# EAGLE board ESCpower3 (EAGLE 5.11)
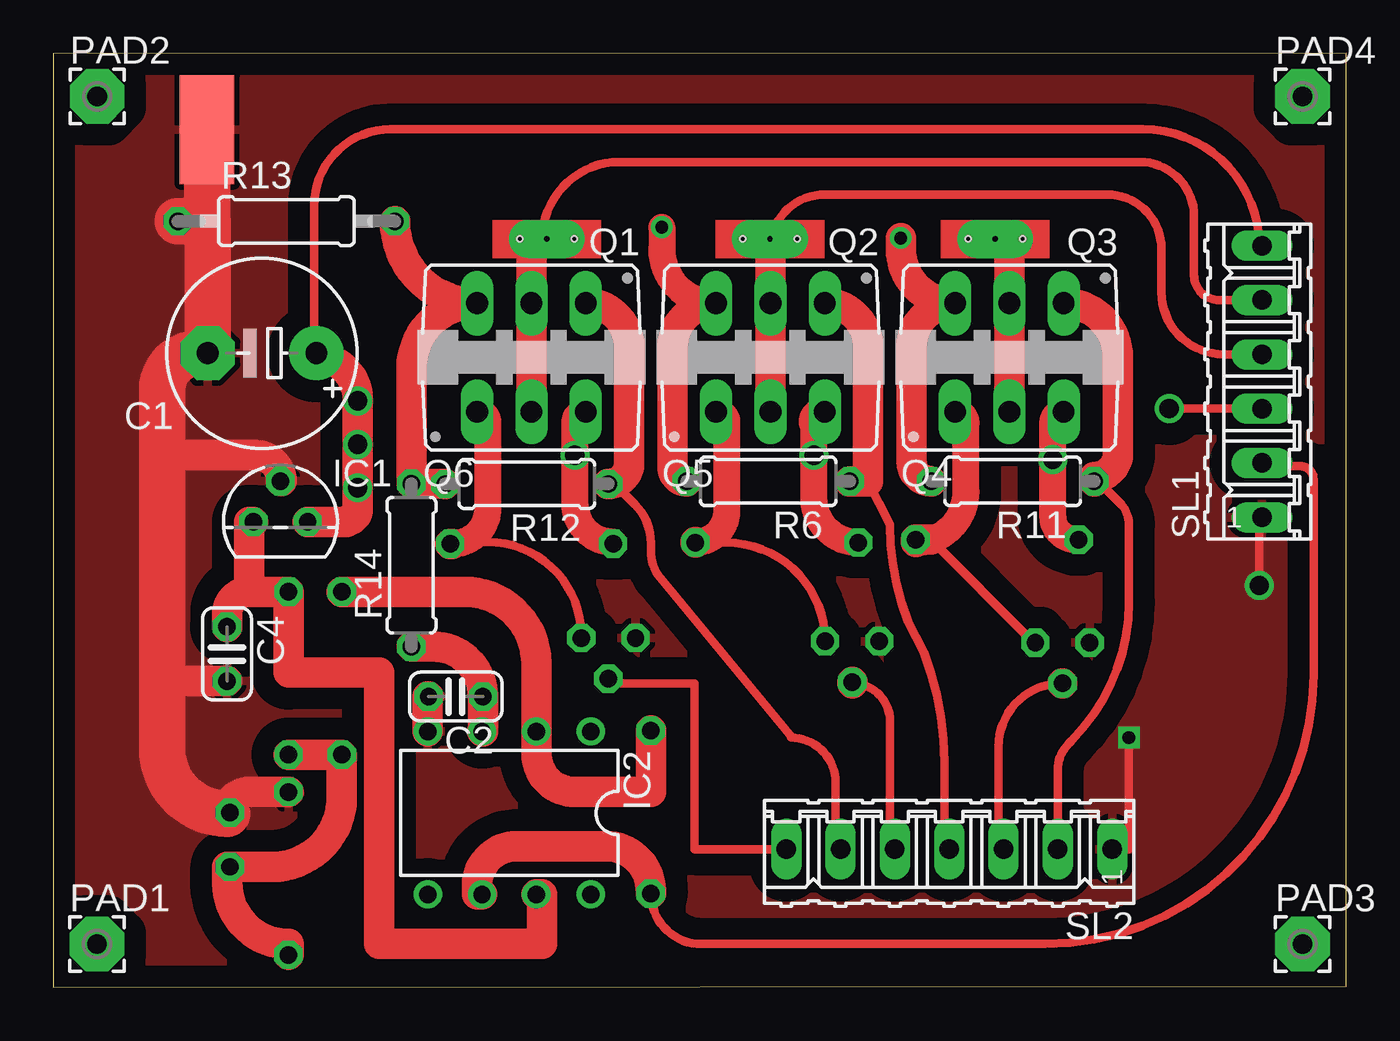
[diagram p0: board, top side]
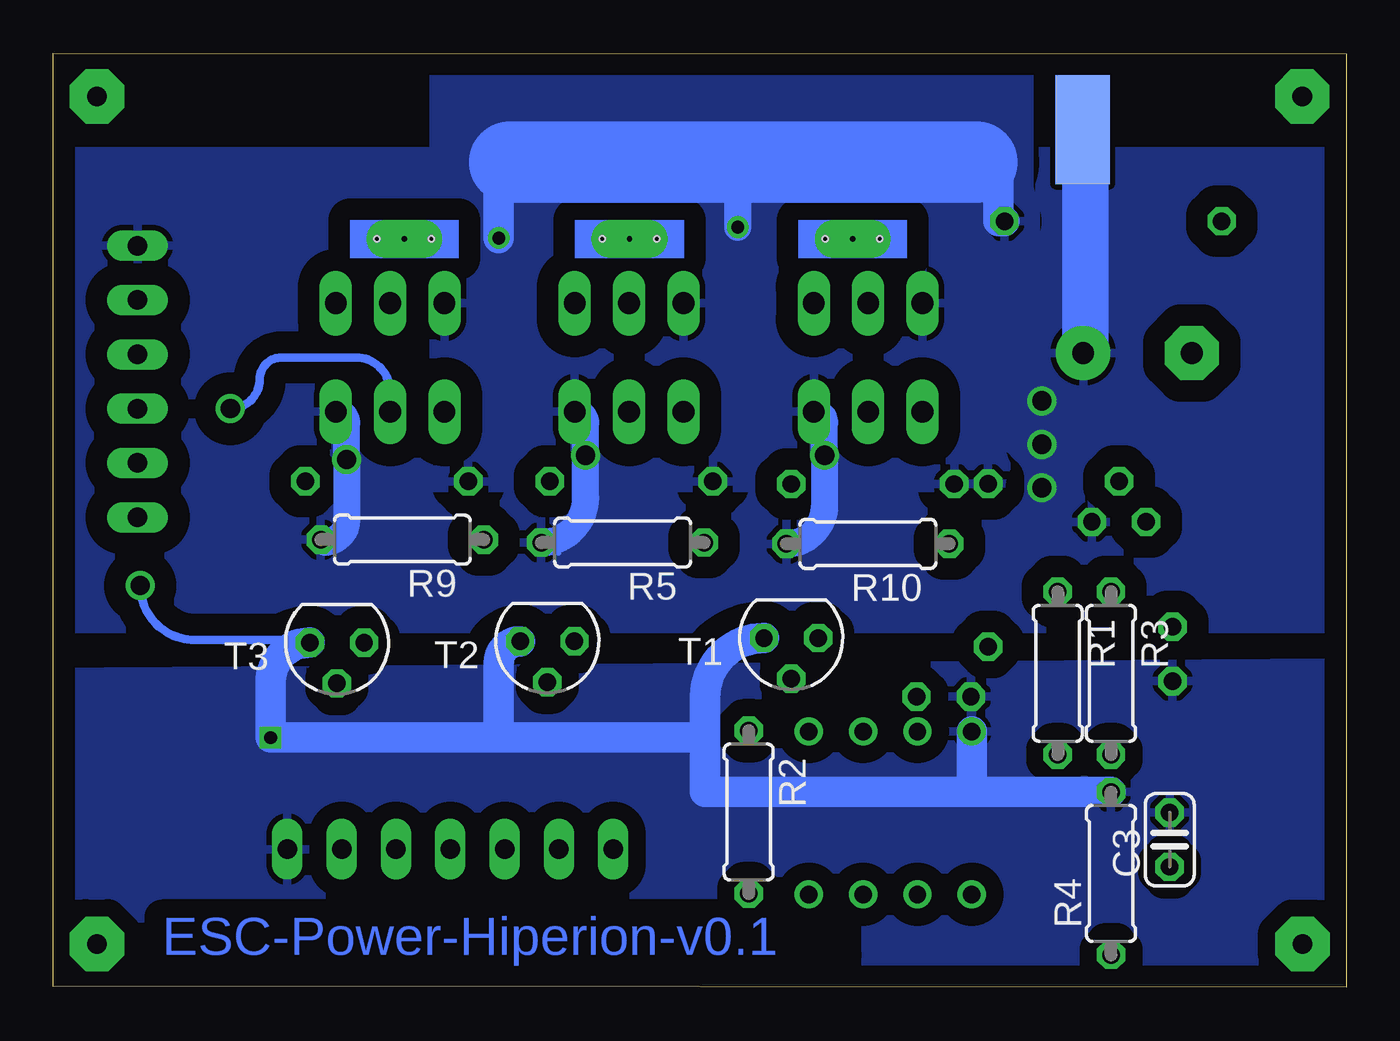
[diagram p1: board, bottom side, seen from below]

Size 60.45 x 43.68 mm. Coordinates in mm from the lower left corner, seen from the top.
Outline: 0,0 60.45,0.05 60.45,43.68 0,43.67 0,0
Copper layers (1*16): Top 0.035mm / dielectric 1.5mm / Bottom 0.035mm
Design rules "default": minimum track width 10mil, minimum drill 24mil, track to track 8mil, track to pad 8mil, pad to pad 8mil, via to via 8mil, smd to smd 8mil, copper to edge 40mil, drill to drill 8mil, minimum pad ring 10mil, minimum via ring 8mil, stop-mask expansion 4mil, vias tented up to drill 0mil, thermal gap 10mil

## Footprints (pad centres in the part's own frame; a part is rotated, then mirrored left to right if it is on the bottom)
BATTERY_CONNECTOR = smd 5.08 x 2.54: P$1 0,0
E5-8,5 = drill 1.016 pad 2.54 round: + -2.54,0 | drill 1.016 pad 2.54 octagon: - 2.54,0
C025-024X044 = drill 0.813 octagon: 1 -1.27,0; 2 1.27,0
TO92 = drill 0.813 octagon: 1 -1.27,0; 2 0,1.905; 3 1.27,0
DIL08 = drill 0.813 pad 1.27 round: 1 -3.81,-3.81; 2 -1.27,-3.81; 3 1.27,-3.81; 4 3.81,-3.81; 5 3.81,3.81; 6 1.27,3.81; 7 -1.27,3.81; 8 -3.81,3.81
2,54/0,9 = drill 0.914 pad 2.54 octagon: 1 0,0
TO220BV = drill 1.016 long: D 0,-2.54; G -2.54,-2.54; S 2.54,-2.54
0207/7 = drill 0.813 octagon: 1 -3.81,0; 2 3.81,0
0207/10 = drill 0.813 octagon: 1 -5.08,0; 2 5.08,0
06P = drill 0.914 long: 1 -6.35,0; 2 -3.81,0; 3 -1.27,0; 4 1.27,0; 5 3.81,0; 6 6.35,0
07P = drill 0.914 long: 1 -7.62,0; 2 -5.08,0; 3 -2.54,0; 4 0,0; 5 2.54,0; 6 5.08,0; 7 7.62,0
SOT54A = drill 0.813 octagon: B 0,1.905; C -1.27,0; E 1.27,0
MOTOR_CONNECTOR = drill 0.254 pad 1.778 long: PINO 0,0 | hole 0.254: -1.27,0; 1.27,0

## Placement (x,y rotation side)
BATTERY+  Battery+  [BATTERY_CONNECTOR]  12.32,40.11 270 bottom
C1  [E5-8,5]  9.75,29.67 180 top
C2  100n  [C025-024X044]  18.82,13.6 180 top
C3  [C025-024X044]  8.25,6.91 90 bottom
C4  100n  [C025-024X044]  8.11,15.6 270 top
IC1  7805L  [TO92]  10.62,21.77 0 top
IC2  TL071P  [DIL08]  21.31,8.16 180 top
PAD1  [2,54/0,9]  2.03,2.03 0 top
PAD2  [2,54/0,9]  2.05,41.68 0 top
PAD3  [2,54/0,9]  58.41,2.04 0 top
PAD4  [2,54/0,9]  58.41,41.67 0 top
Q1  IRF520  [TO220BV]  22.35,29.46 180 top
Q2  IRF520  [TO220BV]  33.53,29.46 180 top
Q3  IRF520  [TO220BV]  44.7,29.46 180 top
Q4  IRF9530  [TO220BV]  44.7,29.46 0 top
Q5  IRF9530  [TO220BV]  33.53,29.46 0 top
Q6  IRF9530  [TO220BV]  22.35,29.46 0 top
R1  4k7  [0207/7]  13.48,14.69 270 bottom
R2  18k  [0207/7]  27.94,8.21 270 bottom
R3  4k7  [0207/7]  10.99,14.69 270 bottom
R4  4k7  [0207/7]  10.99,5.33 90 bottom
R5  470  [0207/7]  33.83,20.81 180 bottom
R6  18k  [0207/7]  33.42,23.67 180 top
R9  470  [0207/7]  44.13,20.94 180 bottom
R10  470  [0207/7]  22.36,20.75 180 bottom
R11  18k  [0207/7]  44.86,23.67 180 top
R12  18k  [0207/7]  22.13,23.55 180 top
R13  SHUNT  [0207/10]  10.89,35.84 0 top
R14  4k7  [0207/7]  16.74,19.75 90 top
SL1  [06P]  56.51,28.34 90 top
SL2  [07P]  41.89,6.47 180 top
T1  BC547  [SOT54A]  25.95,16.34 180 bottom
T2  BC547  [SOT54A]  37.35,16.19 180 bottom
T3  BC547  [SOT54A]  47.19,16.13 180 bottom
U$3  MOTOR_CONNECTOR  [MOTOR_CONNECTOR]  23.08,35 0 top
U$6  MOTOR_CONNECTOR  [MOTOR_CONNECTOR]  33.51,35 0 top
U$9  MOTOR_CONNECTOR  [MOTOR_CONNECTOR]  44.04,35 0 top
U$11  BATTERY_CONNECTOR  [BATTERY_CONNECTOR]  7.18,40.11 270 top

## Library data of the parts
BATTERY+ U$3 U$6 U$9 U$11 = ESC
C1-C4 R1-R6 R9-R14 = rcl
IC1 IC2 = linear
PAD1-PAD4 = wirepad
Q1-Q6 = transistor-power
SL1 SL2 = con-amp-quick; OC_FARNELL: unknown; OC_NEWARK: unknown
T1-T3 = transistor-small-signal

## Nets
FASE_U: Q1.D Q6.D SL1.5 U$3.PINO
FASE_V: Q2.D Q5.D SL1.4 U$6.PINO
FASE_W: Q3.D Q4.D SL1.3 U$9.PINO
GND: C1.- C2.2 C3.2 C4.2 IC1.2 IC2.4 R4.2 R13.1 SL1.1 SL2.1 T1.E T2.E T3.E U$11.P$1
N$1: IC2.2 R1.1 R2.1
N$2: Q6.G R10.1 T1.C
N$5: Q5.G R5.1 T2.C
N$10: Q4.G R9.1 T3.C
N$13: C2.1 IC2.3 R14.1
PWR_MTR: IC2.6 R2.2 SL1.2
UH_PWM: SL2.7 T1.B
UL_PWM: Q1.G R12.1 SL2.6
VCC: C4.1 IC1.1 IC2.7 R3.1
VDD: BATTERY+.P$1 C1.+ IC1.3 Q4.S Q5.S Q6.S R5.2 R9.2 R10.2 SL1.6
VH_PWM: SL2.5 T2.B
VL_PWM: Q2.G R6.1 SL2.4
VREF: C3.1 R1.2 R3.2 R4.1
VSHUNT: Q1.S Q2.S Q3.S R6.2 R11.2 R12.2 R13.2 R14.2
WH_PWM: SL2.3 T3.B
WL_PWM: Q3.G R11.1 SL2.2

## Tracks (layer width: path | path; a pad name or v marks a point on that pad's centre or on a via)
FASE_U
  Top 0.406: 22.86,35 arc-90 26.47,38.61 50.8,38.61 arc-90 53.34,36.07 53.34,33.31 arc90 54.5,32.15 SL1.5
  Top 1.422: Q6.D Q1.D 22.35,35 22.86,35 U$3.PINO
FASE_V
  Top 0.406: 33.53,34.54 arc-90 36.07,37.08 49.28,37.08 arc-90 51.82,34.54 51.82,32.51 arc90 54.72,29.61 SL1.4
  Top 1.422: Q5.D Q2.D 33.53,34.54 33.53,35 U$6.PINO
FASE_W  (via drill 0.9)
  Top 0.406: v52.18,27.07 SL1.3
  Top 1.422: Q4.D Q3.D 44.7,35.05 44.04,35.05 U$9.PINO
  Bottom 0.406: v52.18,27.07 arc-90 50.8,28.45 arc90 49.78,29.46 46.31,29.46 arc90 44.7,27.86 Q4.D 44.7,26.42
GND  (via drill 0.6, 0.9)
  Top 0.406: SL2.1 50.29,6.47 v50.29,11.68 | v56.39,18.8 56.39,21.87 arc-90 SL1.1
  Top 1.422: C3.2 8.25,8.13 8.13,8.13 arc-90 9.14,9.14 R4.2 | 5.08,14.22 arc-90 5.19,14.33 C4.2 | IC1.2 10.67,23.68 arc90 9.46,24.89 5.08,24.89 | C2.2 17.5,13.6 IC2.4
  Top 2.184: 7.18,35.84 R13.1 | 8.13,8.13 arc-90 5.08,11.18 5.08,14.22 5.08,24.89 5.08,27.94 arc-90 6.81,29.67 C1.- 7.21,35.84 7.18,35.84 | 7.18,35.84 U$11.P$1
  Bottom 0.254: 50.16,14.98 49.78,15.24
  Bottom 0.406: v50.29,11.68 50.29,12.19 | 48.26,16.26 53.85,16.26 arc18 54.65,16.39 arc72 v56.39,18.8
  Bottom 1.422: R4.2 17.5,9.14 | 29.97,11.68 29.97,13.59 arc90 T1.E | 17.5,9.14 29.97,9.14 29.97,11.68 | 17.5,9.14 IC2.4 | 39.62,11.68 39.62,15.19 arc90 T2.E | 29.97,11.68 39.62,11.68 | T3.E arc-68 50.16,14.98 arc-22 50.29,14.29 v50.29,11.68 39.62,11.68
  pour Top (isolate 1.016): -1.02,46.74 61.98,46.74 61.98,-0.51 -1.02,-0.51
  pour Bottom (isolate 0.813): -6.1,15.24 64.52,14.73 64.52,-1.02 -6.1,-1.02
N$1
  Top 1.422: R1.1 19.23,18.5 arc-90 22.58,15.15 IC2.2 22.58,10.95 arc90 24.38,9.14 27.94,9.14 R2.1
N$2
  Top 0.406: T1.C 24.68,16.47 arc90 20.32,20.83 18.55,20.83 R10.1
  Top 1.27: 18.64,20.75 arc90 20.32,22.43 20.32,26.42 arc90 Q6.G
  Top 1.422: R10.1 18.64,20.75
N$5
  Top 0.406: T2.C arc90 31.46,20.81 R5.1
  Top 1.27: Q5.G arc-90 31.5,26.42 31.5,22.3 arc-90 30.02,20.83
  Top 1.422: R5.1 30.02,20.83
N$10
  Top 0.406: 41.03,20.95 45.72,16.26 45.79,15.75 T3.C
  Top 1.27: 40.32,20.83 arc90 42.67,23.18 42.67,26.42 arc90 Q4.G
  Top 1.422: 40.32,20.83 R9.1 41.03,20.95
N$13
  Top 1.422: IC2.3 20.09,11.97 C2.1 20.09,13.63 arc90 17.77,15.94 R14.1
PWR_MTR
  Top 0.406: R2.2 R2.2 arc90 30.3,2.03 46.38,2.03 arc90 58.93,14.59 58.93,23.76 arc90 58.3,24.38 56.51,24.38 | 56.51,24.38 56.39,24.38 | 56.51,24.38 SL1.2
  Top 1.422: IC2.6 19.81,4.35 19.81,4.77 arc-90 21.64,6.6 25.84,6.6 arc-90 27.94,4.51 R2.2
UH_PWM
  Top 0.406: SL2.7 29.97,6.47 29.97,14.22 25.95,14.22 T1.B
UL_PWM
  Top 0.406: SL2.6 36.58,6.47 36.58,9.59 arc90 34.48,11.68 34.54,11.68 28.27,19.29 arc-32 27.94,20.43 27.94,20.79 arc45 27.2,22.59 25.91,23.88 25.91,23.58 arc90 R12.1
  Top 1.422: R12.1 arc90 26.92,24.53 26.92,29.97 arc90 Q1.G
VCC
  Top 1.422: C4.1 8.13,16.87 8.13,17.49 arc-90 9.14,18.5 | 9.14,18.5 R3.1 10.99,14.73 15.24,14.73 15.24,2.03 22.86,2.03 22.86,4.35 IC2.7 | IC1.1 9.14,21.77 9.14,18.5
VDD  (via drill 0.9)
  Top 0.406: SL1.6 56.39,34.69 arc90 50.95,40.13 15.75,40.13 arc90 12.19,36.58 12.19,29.97 12.29,29.97 12.29,29.46
  Top 1.27: R5.2 arc-90 35.56,22.89 v35.56,24.89 35.56,26.42 | R9.2 arc-95 46.74,22.04 v46.74,24.69 46.74,26.42 arc-90 Q4.S | Q6.S arc90 24.38,26.42 v24.38,24.89 24.38,22.62 arc90 26.17,20.83 R10.2
  Top 1.422: IC1.3 13.72,21.77 13.72,21.84 arc90 14.22,22.35 v14.22,23.37 v14.22,25.4 v14.22,27.43 14.22,27.53 arc90 12.29,29.46 C1.+ | 35.56,26.42 arc-90 Q5.S
  Bottom 0.254: 46.74,21.84 46.99,21.59 | 37.01,20.9 36.83,20.32 | C1.+ 12.7,29.21 | BATTERY+.P$1 12.7,40.64 12.19,40.64
  Bottom 1.27: R5.2 arc-18 37.01,20.9 arc-72 35.56,22.89 v35.56,24.89 35.56,26.42 arc-90 Q5.S | R10.2 arc-90 24.38,22.54 v24.38,24.89 24.38,26.42 arc-90 Q6.S | 46.74,26.42 v46.74,24.69 46.74,21.84 arc90 47.75,20.83 | 46.74,26.42 arc-90 Q4.S arc90 46.74,26.42
  Bottom 2.184: C1.+ 12.19,29.67 12.19,40.64 12.19,41.15 12.32,41.15
  pour Bottom (isolate 1.016): -5.08,39.12 65.53,39.12 65.53,16.76 -4.57,16.76
VH_PWM
  Top 0.406: SL2.5 39.12,6.47 39.12,12.46 arc90 37.35,14.22
  Top 1.422: 37.35,14.22 T2.B
VL_PWM
  Top 0.406: SL2.4 41.66,6.47 41.66,10.56 arc21 40.71,15.68 39.95,17.12 arc-21 39.12,21.64 38.1,23.67
  Top 1.422: R6.1 38.1,23.67 38.1,29.97 arc90 Q2.G
VREF
  Top 1.422: R4.1 10.99,2.03 arc-90 8.13,4.89 8.13,5.64 C3.1 10.22,5.64 arc90 13.48,8.9 R1.2 R3.2
VSHUNT  (via drill 0.6)
  Top 1.27: Q2.S arc-90 28.45,34.54 v28.45,35.56
  Top 1.422: R6.2 arc-90 28.96,24.33 28.96,29.97 arc-90 Q2.S | R12.2 17.31,23.56 R14.2 16.74,28.93 arc-90 Q1.S Q1.S arc-90 R13.2 | R11.2 arc-90 40.13,24.59 40.13,29.97 arc-90 Q3.S arc-90 39.62,34.54 v39.62,35.05
  Bottom 1.27: 28.45,38.61 v28.45,35.56
  Bottom 1.422: R13.2 16.26,35.84 16.26,38.61 17.27,38.61 | 39.12,38.61 39.62,38.61 v39.62,35.05
  Bottom 3.81: 17.27,38.61 28.45,38.61 39.12,38.61
  pour Bottom (isolate 1.016): 7.62,47.24 42.67,47.24 42.67,23.37 8.13,23.37
WH_PWM
  Top 0.406: SL2.3 44.2,6.47 44.2,11.26 arc-90 47.16,14.22 T3.B
  Top 1.422: T3.B
WL_PWM
  Top 0.406: SL2.2 46.97,10.16 arc-45 47.49,11.42 47.61,11.54 arc45 50.29,18.02 50.29,21.66 arc45 49.88,22.67 48.67,23.88
  Top 1.422: Q3.G arc-90 49.78,29.46 49.78,24.99 arc-90 48.67,23.88 R11.1

## Text on the board
Bottom: ESC-Power-Hiperion-v0.1